# Altium PCB ProjetMoteur.PCBDOC
Units mm, origin at the board's own origin, x right, y up, seen from the top; angles counter-clockwise.
Board outline 299.72 x 199.9 mm, 2 copper layers (Top Layer, Bottom Layer); 13 components, 16 nets, 77 pads, 0 vias.
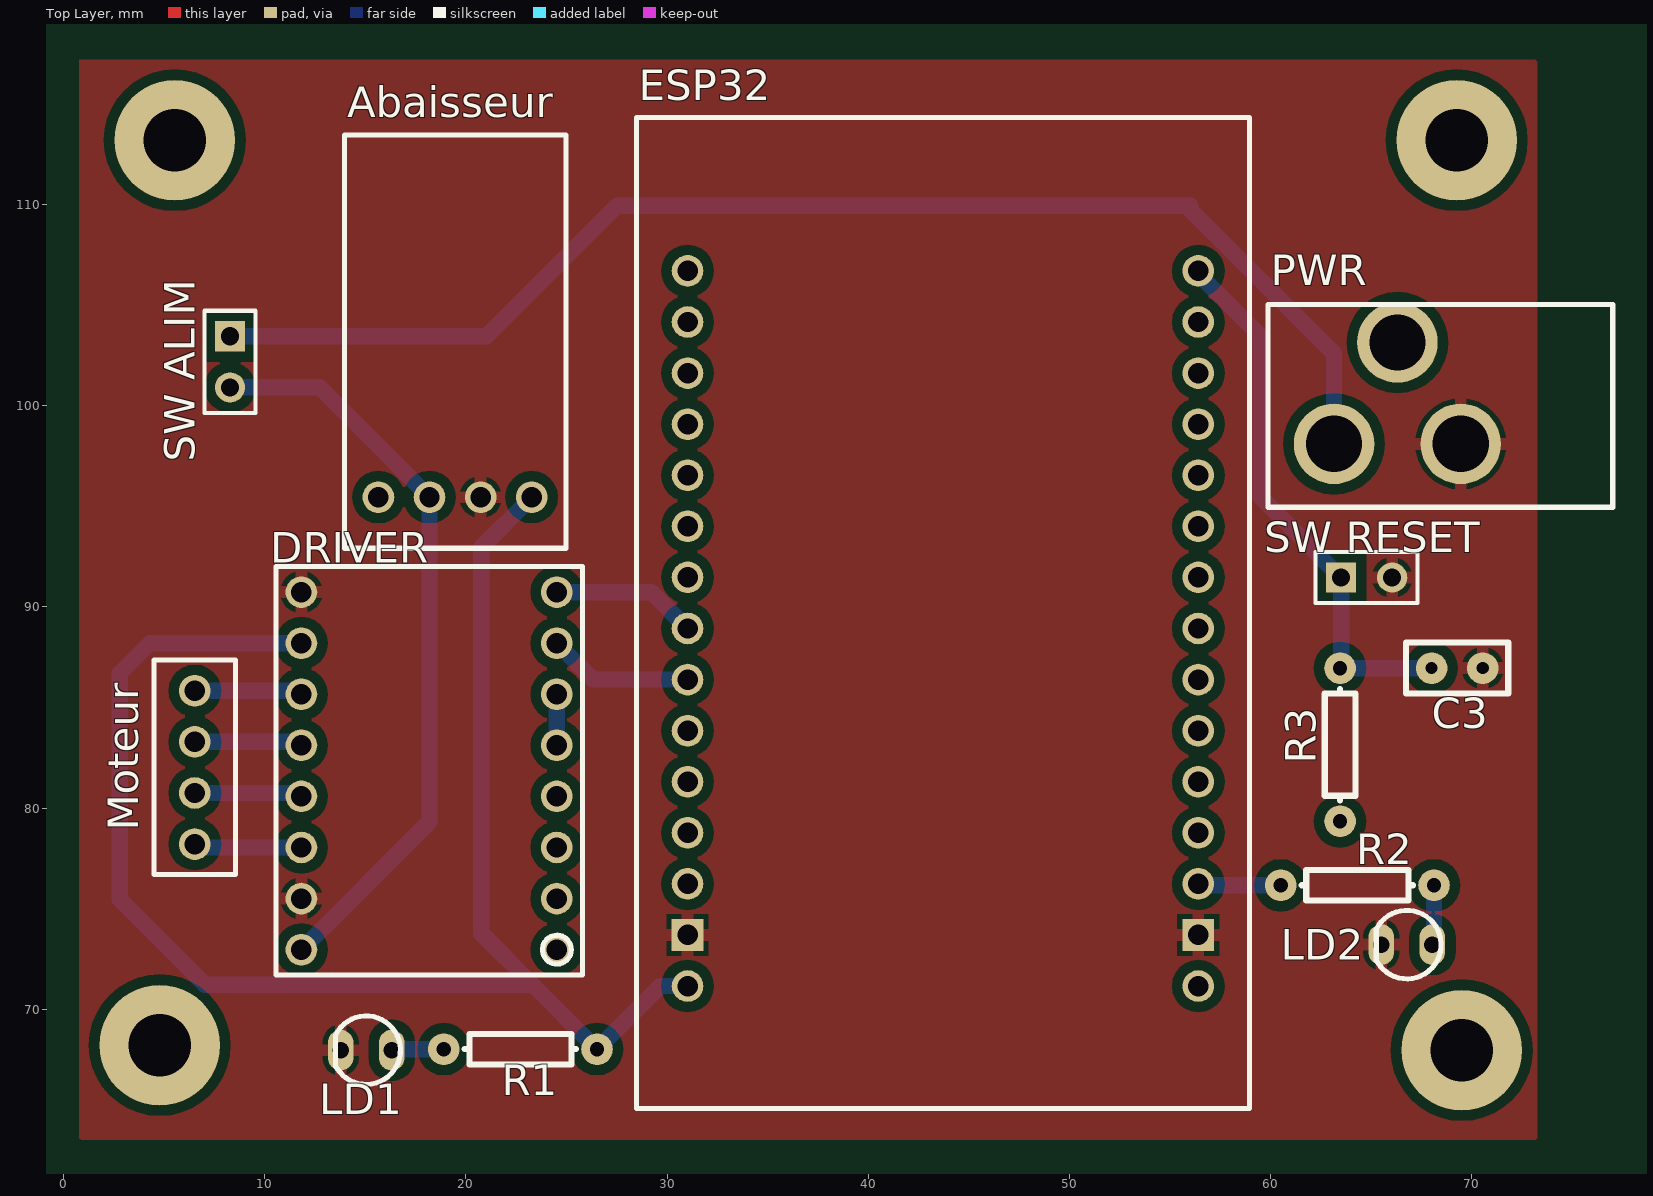
[diagram p0: Top Layer view]
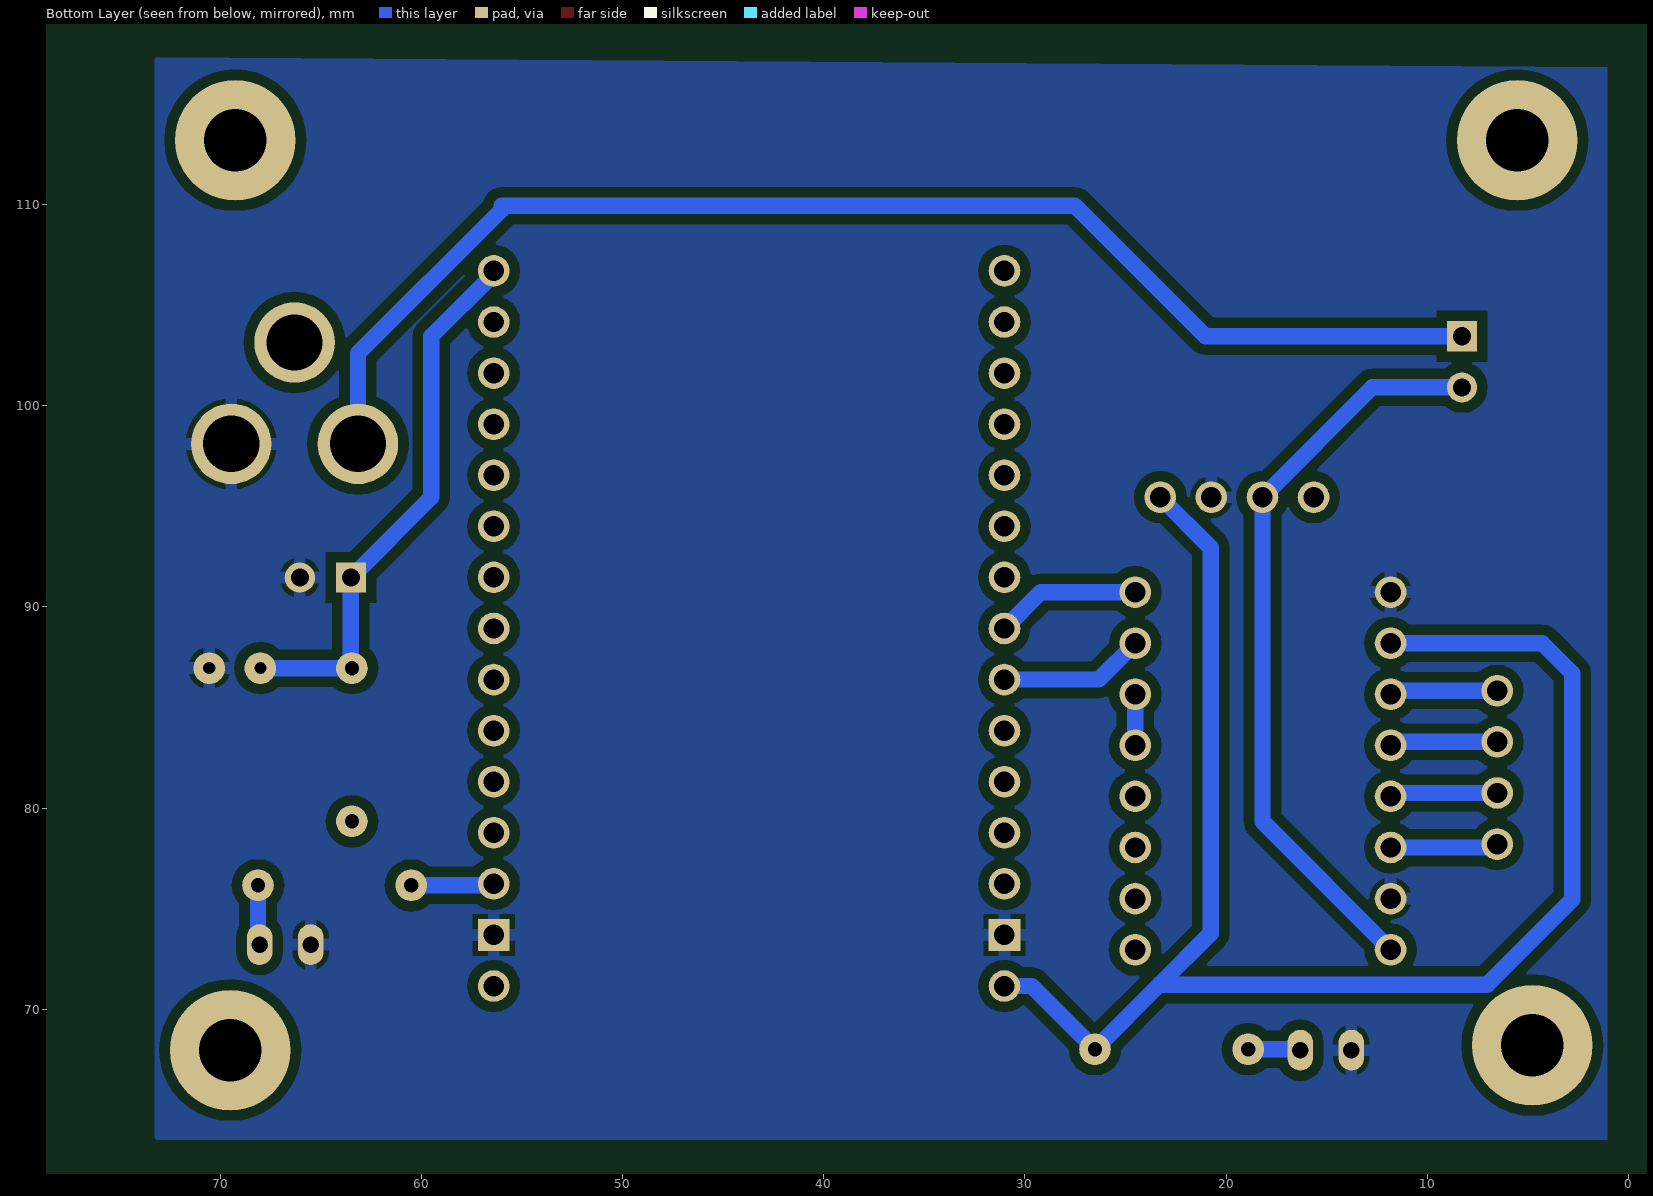
[diagram p1: Bottom Layer view, seen from below]

## Layer stack, top to bottom
Top Solder: solder mask 0.0102, Solder Resist, Dk 3.5
Top Layer: signal copper 0.0356
Dielectric1: dielectric 0.32, FR-4, Dk 4.8
Bottom Layer: signal copper 0.0356
Bottom Solder: solder mask 0.0102, Solder Resist, Dk 3.5

## Board outline
-141.655,-46.39 158.065,-46.39 158.065,153.508 -141.655,153.508

## Design rules (kind name [scope] priority, off if disabled: settings)
Clearance Clearance_bottom_polygon [OnLayer('Bottom Layer') Or OnLayer('Multi-Layer') vs OnLayer('Bottom Layer')  And  InPoly] p1: gap=0.508
Clearance Clearance_bottom_polygon_keepout [OnLayer('Bottom Layer') Or OnLayer('Multi-Layer') Or InPoly vs OnLayer('Keepout')] p2: gap=0
Clearance Clearance_top_polygon [OnLayer('Top Layer')  Or OnLayer('Multi-Layer') vs OnLayer('Top Layer') And InPoly] p3: gap=0.508
Clearance Clearance_bottom [OnLayer('Bottom Layer') Or OnLayer('Multi-Layer') vs OnLayer('Bottom Layer')  And Not InPoly] p4: gap=0.203
Clearance Clearance_top [OnLayer('Top Layer')  Or OnLayer('Multi-Layer') vs OnLayer('Top Layer') And Not InPoly] p5: gap=0.203
Clearance Clearance_pad_to_pad [OnLayer('Multi-Layer') vs OnLayer('Multi-Layer')] p6: gap=0.254
ComponentClearance ComponentClearance_bottom [OnLayer('Bottom Overlay') vs OnLayer('Bottom Overlay')] p1: gap=0 collisioncheckmode=3 verticalgap=0.254 showdistances=FALSE
ComponentClearance ComponentClearance_top [OnLayer('Top Overlay') vs OnLayer('Top Overlay')] p2: gap=0 collisioncheckmode=3 verticalgap=0.254 showdistances=FALSE
FabricationTestPointUsage TestPointUsage [All] p1: valid=0 allowmultiple=FALSE
FabricationTestpoint Testpoint [All] p1: side=3 testpointundercomponent=TRUE minsize=1.016 maxsize=2.54 preferedsize=1.524 minholesize=0 maxholesize=1.016 preferedholesize=0.813 testpointgrid=0.025 allowsidetop=TRUE allowsidebottom=TRUE usegrid=TRUE gridtolerance=0
HoleSize [All] p1: absolutevalues=TRUE maxlimit=25.4 minlimit=0.406 maxpercent=80.000 minpercent=20.000
MinimumAnnularRing [PadXSize_AllLayers = PadYSize_AllLayers] p1: minimumring=0.254
PermittedLayers [All] p1: toplayerpermitted=TRUE bottomlayerpermitted=TRUE
PolygonConnect [All] p1: connectstyle=Relief reliefconductorwidth=0.61 reliefentries=4 polygonreliefangle="90 Angle" airgapwidth=0.254
RoutingVias [All] p1: holewidth=0.406 width=1.27 viastyle="Through Hole" minholewidth=0.406 minwidth=1.27 maxholewidth=25.4 maxwidth=25.4
SMDToPlane [All] p1: distance=0
SolderMaskExpansion [All] p1: expansion=0.102
ViasUnderSMD [All] p1: allowed=FALSE
Width Width_botom_top [OnLayer('Bottom Layer') or OnLayer('Top Layer')] p1: maxlimit=254 minlimit=0.813 preferedwidth=0.813 minimp=50.000000 maximp=50.000000 favimp=50.000000
26 further rules are at their usual default settings.

## Components (designator, comment, footprint, x,y, rotation, side; value= is the part's Value field where it differs from the comment)
Abaisseur "Abaisseurtension" AbaisseurTension 23.27,95.46 r270 top (schematic designator AbaisseurTension)
C3 "CAP" RAD0.1 68.02,86.96 r0 top
DRIVER "Driver" Driver 24.52,72.96 r180 top
ESP32 "ESP32devKit" ESP32 31.02,106.71 r0 top (schematic designator U?)
LD1 "comment" LED3 13.77,67.96 r270 top
LD2 "comment" LED3 65.52,73.21 r270 top
Moteur "Moteur" Moteur 6.52,78.21 r180 top
PWR "Jack-Alim" "Connecteur Power" 60.02,94.96 r0 top (schematic designator Jack)
R1 "RES" AXIAL0.3 26.52,67.96 r180 top
R2 "RES" AXIAL0.3 60.52,76.21 r0 top
R3 "RES" AXIAL0.3 63.52,86.96 r270 top
"SW ALIM" "Header 2" HDR1X2 8.27,103.46 r270 top (schematic designator P1)
"SW RESET" "Header 2" HDR1X2 63.52,91.46 r0 top (schematic designator P?)

## Footprints (in the part's own frame and the unit in brackets; to place one, negate y for a bottom-side part, rotate by r counter-clockwise, add the part's x,y. Pads: shape width x height; smd on the part's side, far side on the other; paste and mask are expansions set on the pad)
AbaisseurTension [mm]
  round 1.575 hole 1.016: 1(0,0) 2(0,-2.54) 3(0,-5.08) 4(0,-7.62)
  silkscreen extent -18,-9.3 2.54,1.7
AXIAL0.3 [mil]
  round 62 hole 28: 1(0,-2) 2(300,-2)
  silkscreen extent 41,-32 259,28
"Connecteur Power" [mm]
  round 4 hole 2.8: 0(3.15,3.15) 2(6.3,8.19) GND(9.45,3.15)
  silkscreen extent -0.13,0 17.01,10.08
Driver [mm]
  round 1.575 hole 1.016: 1(0,0) 2(0,-2.54) 3(0,-5.08) 4(0,-7.62) 5(0,-10.16) 6(0,-12.7) 7(0,-15.24) 8(0,-17.78) 9(12.7,-17.78) 10(12.7,-15.24) 11(12.7,-12.7) 12(12.7,-10.16) 13(12.7,-7.62) 14(12.7,-5.08) 15(12.7,-2.54) 16(12.7,0)
  silkscreen extent -1.27,-19.05 13.97,1.27
ESP32 [mm]
  round 1.575 hole 1.016: 0(0,0) 1(0,-2.54) 2(0,-5.08) 3(0,-7.62) 4(0,-10.16) 5(0,-12.7) 6(0,-15.24) 7(0,-17.78) 8(0,-20.32) 9(0,-22.86) 10(0,-25.4) 11(0,-27.94) 12(0,-30.48) 14(0,-35.56) 15(25.4,-35.56) 17(25.4,-30.48) 18(25.4,-27.94) 19(25.4,-25.4) 20(25.4,-22.86) 21(25.4,-20.32) 22(25.4,-17.78) 23(25.4,-15.24) 24(25.4,-12.7) 25(25.4,-10.16) 26(25.4,-7.62) 27(25.4,-5.08) 28(25.4,-2.54) 29(25.4,0)
  rect 1.575x1.575 hole 1.016: 13(0,-33.02) 16(25.4,-33.02)
  silkscreen extent -2.54,-41.66 27.94,7.62
HDR1X2 [mm] "Connector; Header; 2 Position"
  rect 1.5x1.5 hole 0.9: 1(0,0)
  round 1.5 hole 0.9: 2(2.54,0)
  silkscreen extent -1.27,-1.27 3.81,1.27
LED3 [mil] "3mm LED"
  oval 80x50 hole 32: A(0,100) K(0,0)
  silkscreen extent -67,-10 67,117
Moteur [mm]
  round 1.575 hole 1.016: 1(0,0) 2(0,-2.54) 3(0,-5.08) 4(0,-7.62)
  silkscreen extent -2.03,-9.14 2.03,1.52
RAD0.1 [mil]
  round 62 hole 24: 1(0,0) 2(100,0)
  silkscreen extent -50,-50 150,50

## Part data
C3: "capacité non polarisée"
DRIVER: "Driver A4988"
LD1 LD2: library part LED, "LED 5mm/3mm/CMS"
R1 R2 R3: "resistance"
"SW ALIM" "SW RESET": "Header, 2-Pin"

## Free pads (board coordinates)
  round 6 hole 3.1: 0(5.52,113.21) 1(4.77,68.21) 2(69.27,113.21) 2(69.52,67.96)

## Nets (pads, with @x,y where several pads share a name; then routed paths per layer and width w, separated by ;. In a path a pad name is that pad's centre, name@x,y a point inside that pad or via, vN(x,y) a via of type N, cw(c..) or ccw(c..) an arc to the next point about the centre after c; other vN are vias at no path point)
GND: "SW RESET.2" Abaisseur.2 C3.2 DRIVER.9 DRIVER.15 ESP32.13 ESP32.16 LD1.K LD2.K PWR.GND
NetAbaisseur_1: Abaisseur.1 DRIVER.10 ESP32.14 R1.1 | length 79.9
  Bottom Layer w0.813: DRIVER.10 4.27,88.2 2.78,86.71 2.78,75.45 7.02,71.21 23.219,71.21 23.27,71.261 ; Abaisseur.1 20.77,92.96 20.77,73.761 23.27,71.261 ; ESP32.14 29.659,71.15 R1.1 23.27,71.261
NetAbaisseur_3: "SW ALIM.2" Abaisseur.3 DRIVER.16 | length 37.3
  Bottom Layer w0.813: 8.27,100.92 12.73,100.92 Abaisseur.3 18.19,79.33 DRIVER.16
NetC3_1: "SW RESET.1" C3.1 ESP32.29 R3.1 | length 27.2
  Bottom Layer w0.813: ESP32.29 56.42,106.56 59.52,103.46 59.52,95.46 63.52,91.46 63.52,87.011 63.571,86.96 C3.1
NetDRIVER_5: DRIVER.5 DRIVER.6 | length 2.5
  Bottom Layer w0.813: DRIVER.5 DRIVER.6
NetDRIVER_7: DRIVER.7 ESP32.8 | length 7.2
  Bottom Layer w0.813: DRIVER.7 26.33,86.39 ESP32.8
NetDRIVER_8: DRIVER.8 ESP32.7 | length 7.2
  Bottom Layer w0.813: DRIVER.8 29.21,90.74 ESP32.7
NetDRIVER_11: DRIVER.11 Moteur.4 | length 5.4
  Bottom Layer w0.813: Moteur.4 11.65,85.83 DRIVER.11
NetDRIVER_12: DRIVER.12 Moteur.3 | length 5.4
  Bottom Layer w0.813: Moteur.3 11.65,83.29 DRIVER.12
NetDRIVER_13: DRIVER.13 Moteur.2 | length 5.4
  Bottom Layer w0.813: Moteur.2 11.65,80.75 DRIVER.13
NetDRIVER_14: DRIVER.14 Moteur.1 | length 5.4
  Bottom Layer w0.813: Moteur.1 6.69,78.04 DRIVER.14
NetESP32_17: ESP32.17 R2.1 | length 4.1
  Bottom Layer w0.813: ESP32.17 56.491,76.159 R2.1
NetLD1_A: LD1.A R1.2 | length 2.6
  Bottom Layer w0.813: LD1.A 16.361,68.011 R1.2
NetLD2_A: LD2.A R2.2 | length 3
  Bottom Layer w0.813: LD2.A 68.14,73.29 R2.2
NetPWR_0: "SW ALIM.1" PWR.0 | length 65.3
  Bottom Layer w0.813: 8.27,103.46 21.02,103.46 27.52,109.96 56.02,109.96 56.02,109.76 63.17,102.61 PWR.0
VCC: R3.2
pads on no net: Abaisseur.4 DRIVER.1 DRIVER.2 DRIVER.3 DRIVER.4 ESP32.0 ESP32.1 ESP32.2 ESP32.3 ESP32.4 ESP32.5 ESP32.6 ESP32.9 ESP32.10 ESP32.11 ESP32.12 ESP32.15 ESP32.18 ESP32.19 ESP32.20 ESP32.21 ESP32.22 ESP32.23 ESP32.24 ESP32.25 ESP32.26 ESP32.27 ESP32.28 PWR.2

## Polygon pours and split planes (outlines as drawn)
GND on Bottom Layer "Top Layer-No Net" (solid, pour order 32): 1.041,63.5 73.281,63.5 73.281,117.338 1.041,116.84
GND on Top Layer "Top Layer-No Net" (solid, pour order 34): 0.77,63.5 72.06,63.5 73.27,63.5 73.27,64.71 73.27,117.21 0.77,117.21

## Keep-outs
Keep-Out Layer:
  rectangle: -135.695,148.79 149.305,153.79
  rectangle: 149.305,-41.21 154.305,153.79
  rectangle: -135.695,-46.21 154.305,-41.21
  rectangle: -140.695,-46.21 -135.695,153.79

## Silkscreen, mask and mechanical layers (free items; w line width, h text height)
Mechanical 1:
  lines w0.813: 0.77,63.5 73.27,63.5 73.27,115.96 73.27,117.21 0.77,117.21 0.77,63.5
Mechanical 32:
  text "Les bandes en violet delimitent la surface utilisable...." at -127.762,169.266 h5.08
  text "Mais vous n'etes pas obliges de tout utiliser!!" at -109.982,158.699 h5.08
  text "ATTENTION:" at 165.633,139.979 h5.08
  text "Par defaut, les pistes" at 165.633,129.565 h5.08
  text "ont 32mil de largeur" at 165.506,119.964 h5.08
  text "En cas de besoin, cette largeur" at 165.786,110.769 h5.08
  text "peut etre reduite jusqu'a 10 mil" at 165.506,100.406 h5.08
  text "Par defaut, les vias" at 166.218,82.652 h5.08
  text "ont un diam. de 50 mil" at 166.065,72.492 h5.08
  text "En cas de besoin, ce diam." at 165.202,60.401 h5.08
  text "peut etre reduit jusqu'a 36 mil" at 165.811,49.479 h5.08